# EAGLE board Temperature_sensor_cascade (EAGLE 7.7.0)
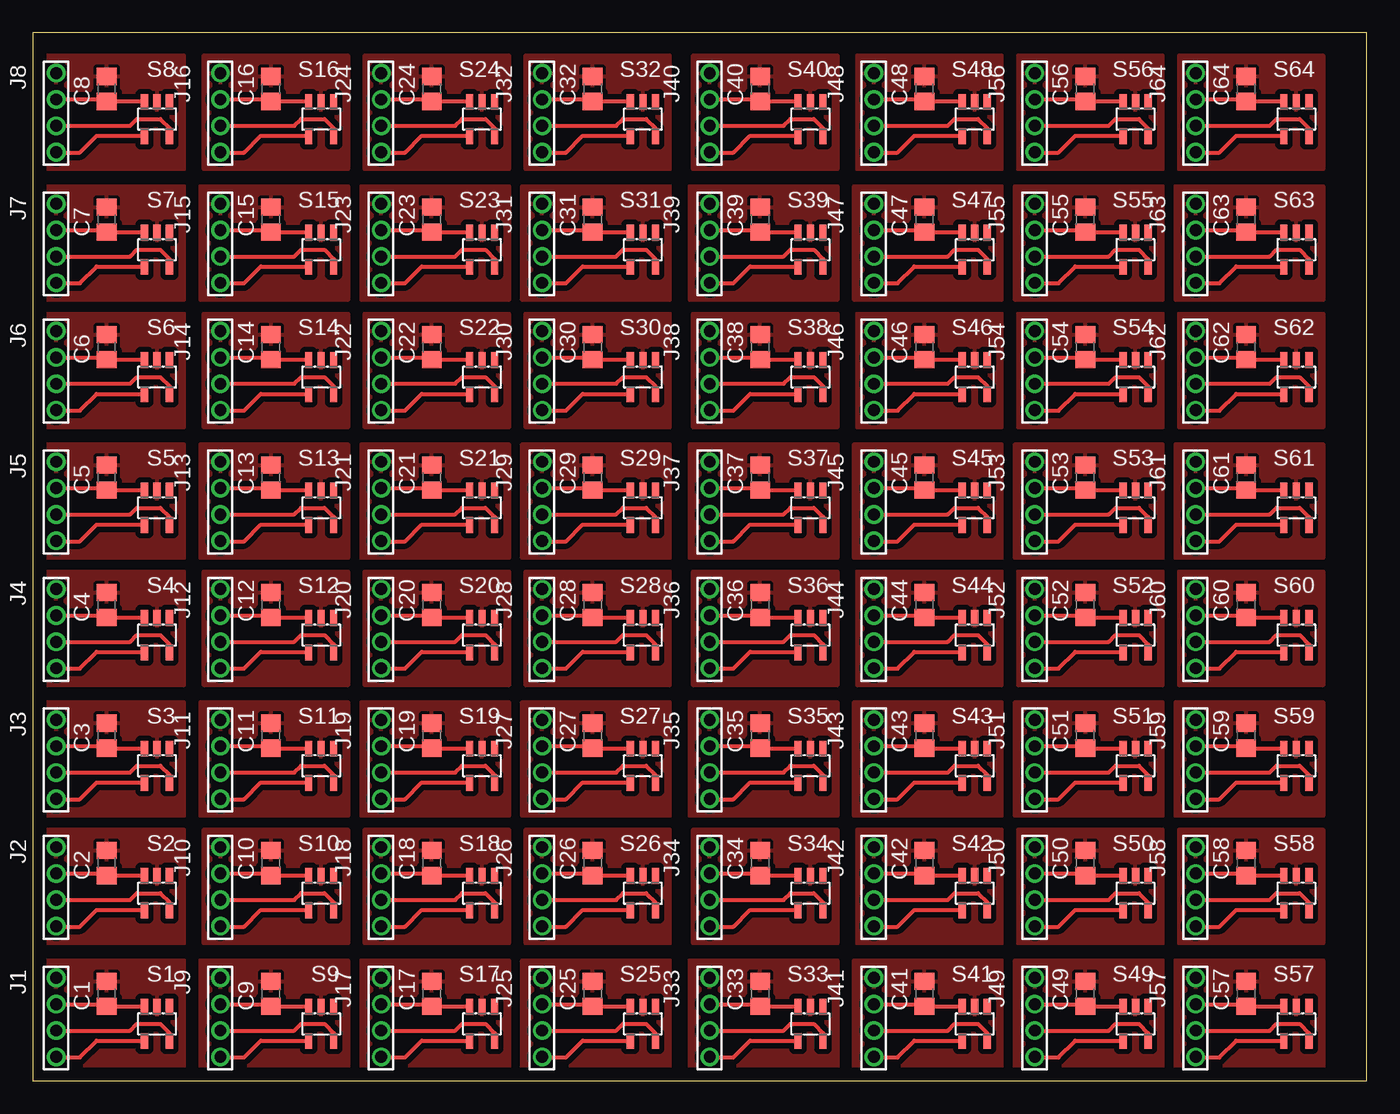
[diagram p0: board, top side]

Size 101.07 x 79.43 mm. Coordinates in mm from the lower left corner, seen from the top.
Outline: 0,0 101.07,0 101.07,79.43 0,79.43 0,0
Copper layers (1*16): Top 0.035mm / dielectric 1.5mm / Bottom 0.035mm
Design rules "default *": minimum track width 10mil, minimum drill 24mil, track to track 16mil, track to pad 14mil, pad to pad 14mil, via to via 14mil, smd to smd 14mil, copper to edge 40mil, drill to drill 8mil, minimum pad ring 10mil, minimum via ring 8mil, stop-mask expansion 4mil, vias tented up to drill 0mil, thermal gap 10mil

## Footprints (pad centres in the part's own frame; a part is rotated, then mirrored left to right if it is on the bottom)
C0805 = smd 1.3 x 1.5: 1 -0.95,0; 2 0.95,0
2MM_4PIN = drill 0.9 pad 1.27: 2 -2.73,-0.27; 4 -0.73,-0.27; 6 1.27,-0.27; 8 3.27,-0.27
SOT23-5L = smd 0.55 x 1.2: 1 -0.95,-1.3; 2 0,-1.3; 3 0.95,-1.3; 4 0.95,1.3; 5 -0.95,1.3

## Placement (x,y rotation side)
C1  0.01uF  [C0805]  5.59,6.6 90 top
C2  0.01uF  [C0805]  5.59,16.51 90 top
C3  0.01uF  [C0805]  5.59,26.16 90 top
C4  0.01uF  [C0805]  5.59,36.07 90 top
C5  0.01uF  [C0805]  5.59,45.72 90 top
C6  0.01uF  [C0805]  5.59,55.63 90 top
C7  0.01uF  [C0805]  5.59,65.28 90 top
C8  0.01uF  [C0805]  5.59,75.18 90 top
C9  0.01uF  [C0805]  18.03,6.6 90 top
C10  0.01uF  [C0805]  18.03,16.51 90 top
C11  0.01uF  [C0805]  18.03,26.16 90 top
C12  0.01uF  [C0805]  18.03,36.07 90 top
C13  0.01uF  [C0805]  18.03,45.72 90 top
C14  0.01uF  [C0805]  18.03,55.63 90 top
C15  0.01uF  [C0805]  18.03,65.28 90 top
C16  0.01uF  [C0805]  18.03,75.18 90 top
C17  0.01uF  [C0805]  30.23,6.6 90 top
C18  0.01uF  [C0805]  30.23,16.51 90 top
C19  0.01uF  [C0805]  30.23,26.16 90 top
C20  0.01uF  [C0805]  30.23,36.07 90 top
C21  0.01uF  [C0805]  30.23,45.72 90 top
C22  0.01uF  [C0805]  30.23,55.63 90 top
C23  0.01uF  [C0805]  30.23,65.28 90 top
C24  0.01uF  [C0805]  30.23,75.18 90 top
C25  0.01uF  [C0805]  42.42,6.6 90 top
C26  0.01uF  [C0805]  42.42,16.51 90 top
C27  0.01uF  [C0805]  42.42,26.16 90 top
C28  0.01uF  [C0805]  42.42,36.07 90 top
C29  0.01uF  [C0805]  42.42,45.72 90 top
C30  0.01uF  [C0805]  42.42,55.63 90 top
C31  0.01uF  [C0805]  42.42,65.28 90 top
C32  0.01uF  [C0805]  42.42,75.18 90 top
C33  0.01uF  [C0805]  55.12,6.6 90 top
C34  0.01uF  [C0805]  55.12,16.51 90 top
C35  0.01uF  [C0805]  55.12,26.16 90 top
C36  0.01uF  [C0805]  55.12,36.07 90 top
C37  0.01uF  [C0805]  55.12,45.72 90 top
C38  0.01uF  [C0805]  55.12,55.63 90 top
C39  0.01uF  [C0805]  55.12,65.28 90 top
C40  0.01uF  [C0805]  55.12,75.18 90 top
C41  0.01uF  [C0805]  67.56,6.6 90 top
C42  0.01uF  [C0805]  67.56,16.51 90 top
C43  0.01uF  [C0805]  67.56,26.16 90 top
C44  0.01uF  [C0805]  67.56,36.07 90 top
C45  0.01uF  [C0805]  67.56,45.72 90 top
C46  0.01uF  [C0805]  67.56,55.63 90 top
C47  0.01uF  [C0805]  67.56,65.28 90 top
C48  0.01uF  [C0805]  67.56,75.18 90 top
C49  0.01uF  [C0805]  79.76,6.6 90 top
C50  0.01uF  [C0805]  79.76,16.51 90 top
C51  0.01uF  [C0805]  79.76,26.16 90 top
C52  0.01uF  [C0805]  79.76,36.07 90 top
C53  0.01uF  [C0805]  79.76,45.72 90 top
C54  0.01uF  [C0805]  79.76,55.63 90 top
C55  0.01uF  [C0805]  79.76,65.28 90 top
C56  0.01uF  [C0805]  79.76,75.18 90 top
C57  0.01uF  [C0805]  91.95,6.6 90 top
C58  0.01uF  [C0805]  91.95,16.51 90 top
C59  0.01uF  [C0805]  91.95,26.16 90 top
C60  0.01uF  [C0805]  91.95,36.07 90 top
C61  0.01uF  [C0805]  91.95,45.72 90 top
C62  0.01uF  [C0805]  91.95,55.63 90 top
C63  0.01uF  [C0805]  91.95,65.28 90 top
C64  0.01uF  [C0805]  91.95,75.18 90 top
J1  4_PIN_2MM  [2MM_4PIN]  2.03,5.08 270 top
J2  4_PIN_2MM  [2MM_4PIN]  2.03,14.99 270 top
J3  4_PIN_2MM  [2MM_4PIN]  2.03,24.64 270 top
J4  4_PIN_2MM  [2MM_4PIN]  2.03,34.54 270 top
J5  4_PIN_2MM  [2MM_4PIN]  2.03,44.2 270 top
J6  4_PIN_2MM  [2MM_4PIN]  2.03,54.1 270 top
J7  4_PIN_2MM  [2MM_4PIN]  2.03,63.75 270 top
J8  4_PIN_2MM  [2MM_4PIN]  2.03,73.66 270 top
J9  4_PIN_2MM  [2MM_4PIN]  14.48,5.08 270 top
J10  4_PIN_2MM  [2MM_4PIN]  14.48,14.99 270 top
J11  4_PIN_2MM  [2MM_4PIN]  14.48,24.64 270 top
J12  4_PIN_2MM  [2MM_4PIN]  14.48,34.54 270 top
J13  4_PIN_2MM  [2MM_4PIN]  14.48,44.2 270 top
J14  4_PIN_2MM  [2MM_4PIN]  14.48,54.1 270 top
J15  4_PIN_2MM  [2MM_4PIN]  14.48,63.75 270 top
J16  4_PIN_2MM  [2MM_4PIN]  14.48,73.66 270 top
J17  4_PIN_2MM  [2MM_4PIN]  26.67,5.08 270 top
J18  4_PIN_2MM  [2MM_4PIN]  26.67,14.99 270 top
J19  4_PIN_2MM  [2MM_4PIN]  26.67,24.64 270 top
J20  4_PIN_2MM  [2MM_4PIN]  26.67,34.54 270 top
J21  4_PIN_2MM  [2MM_4PIN]  26.67,44.2 270 top
J22  4_PIN_2MM  [2MM_4PIN]  26.67,54.1 270 top
J23  4_PIN_2MM  [2MM_4PIN]  26.67,63.75 270 top
J24  4_PIN_2MM  [2MM_4PIN]  26.67,73.66 270 top
J25  4_PIN_2MM  [2MM_4PIN]  38.86,5.08 270 top
J26  4_PIN_2MM  [2MM_4PIN]  38.86,14.99 270 top
J27  4_PIN_2MM  [2MM_4PIN]  38.86,24.64 270 top
J28  4_PIN_2MM  [2MM_4PIN]  38.86,34.54 270 top
J29  4_PIN_2MM  [2MM_4PIN]  38.86,44.2 270 top
J30  4_PIN_2MM  [2MM_4PIN]  38.86,54.1 270 top
J31  4_PIN_2MM  [2MM_4PIN]  38.86,63.75 270 top
J32  4_PIN_2MM  [2MM_4PIN]  38.86,73.66 270 top
J33  4_PIN_2MM  [2MM_4PIN]  51.56,5.08 270 top
J34  4_PIN_2MM  [2MM_4PIN]  51.56,14.99 270 top
J35  4_PIN_2MM  [2MM_4PIN]  51.56,24.64 270 top
J36  4_PIN_2MM  [2MM_4PIN]  51.56,34.54 270 top
J37  4_PIN_2MM  [2MM_4PIN]  51.56,44.2 270 top
J38  4_PIN_2MM  [2MM_4PIN]  51.56,54.1 270 top
J39  4_PIN_2MM  [2MM_4PIN]  51.56,63.75 270 top
J40  4_PIN_2MM  [2MM_4PIN]  51.56,73.66 270 top
J41  4_PIN_2MM  [2MM_4PIN]  64.01,5.08 270 top
J42  4_PIN_2MM  [2MM_4PIN]  64.01,14.99 270 top
J43  4_PIN_2MM  [2MM_4PIN]  64.01,24.64 270 top
J44  4_PIN_2MM  [2MM_4PIN]  64.01,34.54 270 top
J45  4_PIN_2MM  [2MM_4PIN]  64.01,44.2 270 top
J46  4_PIN_2MM  [2MM_4PIN]  64.01,54.1 270 top
J47  4_PIN_2MM  [2MM_4PIN]  64.01,63.75 270 top
J48  4_PIN_2MM  [2MM_4PIN]  64.01,73.66 270 top
J49  4_PIN_2MM  [2MM_4PIN]  76.2,5.08 270 top
J50  4_PIN_2MM  [2MM_4PIN]  76.2,14.99 270 top
J51  4_PIN_2MM  [2MM_4PIN]  76.2,24.64 270 top
J52  4_PIN_2MM  [2MM_4PIN]  76.2,34.54 270 top
J53  4_PIN_2MM  [2MM_4PIN]  76.2,44.2 270 top
J54  4_PIN_2MM  [2MM_4PIN]  76.2,54.1 270 top
J55  4_PIN_2MM  [2MM_4PIN]  76.2,63.75 270 top
J56  4_PIN_2MM  [2MM_4PIN]  76.2,73.66 270 top
J57  4_PIN_2MM  [2MM_4PIN]  88.39,5.08 270 top
J58  4_PIN_2MM  [2MM_4PIN]  88.39,14.99 270 top
J59  4_PIN_2MM  [2MM_4PIN]  88.39,24.64 270 top
J60  4_PIN_2MM  [2MM_4PIN]  88.39,34.54 270 top
J61  4_PIN_2MM  [2MM_4PIN]  88.39,44.2 270 top
J62  4_PIN_2MM  [2MM_4PIN]  88.39,54.1 270 top
J63  4_PIN_2MM  [2MM_4PIN]  88.39,63.75 270 top
J64  4_PIN_2MM  [2MM_4PIN]  88.39,73.66 270 top
S1  TC74  [SOT23-5L]  9.4,4.32 180 top
S2  TC74  [SOT23-5L]  9.4,14.22 180 top
S3  TC74  [SOT23-5L]  9.4,23.88 180 top
S4  TC74  [SOT23-5L]  9.4,33.78 180 top
S5  TC74  [SOT23-5L]  9.4,43.43 180 top
S6  TC74  [SOT23-5L]  9.4,53.34 180 top
S7  TC74  [SOT23-5L]  9.4,62.99 180 top
S8  TC74  [SOT23-5L]  9.4,72.9 180 top
S9  TC74  [SOT23-5L]  21.84,4.32 180 top
S10  TC74  [SOT23-5L]  21.84,14.22 180 top
S11  TC74  [SOT23-5L]  21.84,23.88 180 top
S12  TC74  [SOT23-5L]  21.84,33.78 180 top
S13  TC74  [SOT23-5L]  21.84,43.43 180 top
S14  TC74  [SOT23-5L]  21.84,53.34 180 top
S15  TC74  [SOT23-5L]  21.84,62.99 180 top
S16  TC74  [SOT23-5L]  21.84,72.9 180 top
S17  TC74  [SOT23-5L]  34.04,4.32 180 top
S18  TC74  [SOT23-5L]  34.04,14.22 180 top
S19  TC74  [SOT23-5L]  34.04,23.88 180 top
S20  TC74  [SOT23-5L]  34.04,33.78 180 top
S21  TC74  [SOT23-5L]  34.04,43.43 180 top
S22  TC74  [SOT23-5L]  34.04,53.34 180 top
S23  TC74  [SOT23-5L]  34.04,62.99 180 top
S24  TC74  [SOT23-5L]  34.04,72.9 180 top
S25  TC74  [SOT23-5L]  46.23,4.32 180 top
S26  TC74  [SOT23-5L]  46.23,14.22 180 top
S27  TC74  [SOT23-5L]  46.23,23.88 180 top
S28  TC74  [SOT23-5L]  46.23,33.78 180 top
S29  TC74  [SOT23-5L]  46.23,43.43 180 top
S30  TC74  [SOT23-5L]  46.23,53.34 180 top
S31  TC74  [SOT23-5L]  46.23,62.99 180 top
S32  TC74  [SOT23-5L]  46.23,72.9 180 top
S33  TC74  [SOT23-5L]  58.93,4.32 180 top
S34  TC74  [SOT23-5L]  58.93,14.22 180 top
S35  TC74  [SOT23-5L]  58.93,23.88 180 top
S36  TC74  [SOT23-5L]  58.93,33.78 180 top
S37  TC74  [SOT23-5L]  58.93,43.43 180 top
S38  TC74  [SOT23-5L]  58.93,53.34 180 top
S39  TC74  [SOT23-5L]  58.93,62.99 180 top
S40  TC74  [SOT23-5L]  58.93,72.9 180 top
S41  TC74  [SOT23-5L]  71.37,4.32 180 top
S42  TC74  [SOT23-5L]  71.37,14.22 180 top
S43  TC74  [SOT23-5L]  71.37,23.88 180 top
S44  TC74  [SOT23-5L]  71.37,33.78 180 top
S45  TC74  [SOT23-5L]  71.37,43.43 180 top
S46  TC74  [SOT23-5L]  71.37,53.34 180 top
S47  TC74  [SOT23-5L]  71.37,62.99 180 top
S48  TC74  [SOT23-5L]  71.37,72.9 180 top
S49  TC74  [SOT23-5L]  83.57,4.32 180 top
S50  TC74  [SOT23-5L]  83.57,14.22 180 top
S51  TC74  [SOT23-5L]  83.57,23.88 180 top
S52  TC74  [SOT23-5L]  83.57,33.78 180 top
S53  TC74  [SOT23-5L]  83.57,43.43 180 top
S54  TC74  [SOT23-5L]  83.57,53.34 180 top
S55  TC74  [SOT23-5L]  83.57,62.99 180 top
S56  TC74  [SOT23-5L]  83.57,72.9 180 top
S57  TC74  [SOT23-5L]  95.76,4.32 180 top
S58  TC74  [SOT23-5L]  95.76,14.22 180 top
S59  TC74  [SOT23-5L]  95.76,23.88 180 top
S60  TC74  [SOT23-5L]  95.76,33.78 180 top
S61  TC74  [SOT23-5L]  95.76,43.43 180 top
S62  TC74  [SOT23-5L]  95.76,53.34 180 top
S63  TC74  [SOT23-5L]  95.76,62.99 180 top
S64  TC74  [SOT23-5L]  95.76,72.9 180 top

## Library data of the parts
C1-C64 = rcl
J1-J64 S1-S64 = Mine

## Nets
GND: C1.2 J1.2 S1.2
GND1: C2.2 J2.2 S2.2
GND2: C3.2 J3.2 S3.2
GND3: C4.2 J4.2 S4.2
GND4: C5.2 J5.2 S5.2
GND5: C6.2 J6.2 S6.2
GND6: C7.2 J7.2 S7.2
GND7: C8.2 J8.2 S8.2
GND8: C9.2 J9.2 S9.2
GND9: C10.2 J10.2 S10.2
GND10: C11.2 J11.2 S11.2
GND11: C12.2 J12.2 S12.2
GND12: C13.2 J13.2 S13.2
GND13: C14.2 J14.2 S14.2
GND14: C15.2 J15.2 S15.2
GND15: C16.2 J16.2 S16.2
GND16: C17.2 J17.2 S17.2
GND17: C18.2 J18.2 S18.2
GND18: C19.2 J19.2 S19.2
GND19: C20.2 J20.2 S20.2
GND20: C21.2 J21.2 S21.2
GND21: C22.2 J22.2 S22.2
GND22: C23.2 J23.2 S23.2
GND23: C24.2 J24.2 S24.2
GND24: C25.2 J25.2 S25.2
GND25: C26.2 J26.2 S26.2
GND26: C27.2 J27.2 S27.2
GND27: C28.2 J28.2 S28.2
GND28: C29.2 J29.2 S29.2
GND29: C30.2 J30.2 S30.2
GND30: C31.2 J31.2 S31.2
GND31: C32.2 J32.2 S32.2
GND32: C33.2 J33.2 S33.2
GND33: C34.2 J34.2 S34.2
GND34: C35.2 J35.2 S35.2
GND35: C36.2 J36.2 S36.2
GND36: C37.2 J37.2 S37.2
GND37: C38.2 J38.2 S38.2
GND38: C39.2 J39.2 S39.2
GND39: C40.2 J40.2 S40.2
GND40: C41.2 J41.2 S41.2
GND41: C42.2 J42.2 S42.2
GND42: C43.2 J43.2 S43.2
GND43: C44.2 J44.2 S44.2
GND44: C45.2 J45.2 S45.2
GND45: C46.2 J46.2 S46.2
GND46: C47.2 J47.2 S47.2
GND47: C48.2 J48.2 S48.2
GND48: C49.2 J49.2 S49.2
GND49: C50.2 J50.2 S50.2
GND50: C51.2 J51.2 S51.2
GND51: C52.2 J52.2 S52.2
GND52: C53.2 J53.2 S53.2
GND53: C54.2 J54.2 S54.2
GND54: C55.2 J55.2 S55.2
GND55: C56.2 J56.2 S56.2
GND56: C57.2 J57.2 S57.2
GND57: C58.2 J58.2 S58.2
GND58: C59.2 J59.2 S59.2
GND59: C60.2 J60.2 S60.2
GND60: C61.2 J61.2 S61.2
GND61: C62.2 J62.2 S62.2
GND62: C63.2 J63.2 S63.2
GND63: C64.2 J64.2 S64.2
N$1: J2.6 S2.5
N$2: C1.1 J1.4 S1.3
N$3: J1.6 S1.5
N$4: J1.8 S1.4
N$5: J2.8 S2.4
N$6: C2.1 J2.4 S2.3
N$7: J3.6 S3.5
N$8: J3.8 S3.4
N$9: C3.1 J3.4 S3.3
N$10: J4.6 S4.5
N$11: J4.8 S4.4
N$12: C4.1 J4.4 S4.3
N$13: J5.6 S5.5
N$14: J5.8 S5.4
N$15: C5.1 J5.4 S5.3
N$16: J6.6 S6.5
N$17: J6.8 S6.4
N$18: C6.1 J6.4 S6.3
N$19: J7.6 S7.5
N$20: J7.8 S7.4
N$21: C7.1 J7.4 S7.3
N$22: J8.6 S8.5
N$23: J8.8 S8.4
N$24: C8.1 J8.4 S8.3
N$25: J9.6 S9.5
N$26: J9.8 S9.4
N$27: C9.1 J9.4 S9.3
N$28: J10.6 S10.5
N$29: J10.8 S10.4
N$30: C10.1 J10.4 S10.3
N$31: J11.6 S11.5
N$32: J11.8 S11.4
N$33: C11.1 J11.4 S11.3
N$34: J12.6 S12.5
N$35: J12.8 S12.4
N$36: C12.1 J12.4 S12.3
N$37: J13.6 S13.5
N$38: J13.8 S13.4
N$39: C13.1 J13.4 S13.3
N$40: J14.6 S14.5
N$41: J14.8 S14.4
N$42: C14.1 J14.4 S14.3
N$43: J15.6 S15.5
N$44: J15.8 S15.4
N$45: C15.1 J15.4 S15.3
N$46: J16.6 S16.5
N$47: J16.8 S16.4
N$48: C16.1 J16.4 S16.3
N$49: J17.6 S17.5
N$50: J17.8 S17.4
N$51: C17.1 J17.4 S17.3
N$52: J18.6 S18.5
N$53: J18.8 S18.4
N$54: C18.1 J18.4 S18.3
N$55: J19.6 S19.5
N$56: J19.8 S19.4
N$57: C19.1 J19.4 S19.3
N$58: J20.6 S20.5
N$59: J20.8 S20.4
N$60: C20.1 J20.4 S20.3
N$61: J21.6 S21.5
N$62: J21.8 S21.4
N$63: C21.1 J21.4 S21.3
N$64: J22.6 S22.5
N$65: J22.8 S22.4
N$66: C22.1 J22.4 S22.3
N$67: J23.6 S23.5
N$68: J23.8 S23.4
N$69: C23.1 J23.4 S23.3
N$70: J24.6 S24.5
N$71: J24.8 S24.4
N$72: C24.1 J24.4 S24.3
N$73: J25.6 S25.5
N$74: J25.8 S25.4
N$75: C25.1 J25.4 S25.3
N$76: J26.6 S26.5
N$77: J26.8 S26.4
N$78: C26.1 J26.4 S26.3
N$79: J27.6 S27.5
N$80: J27.8 S27.4
N$81: C27.1 J27.4 S27.3
N$82: J28.6 S28.5
N$83: J28.8 S28.4
N$84: C28.1 J28.4 S28.3
N$85: J29.6 S29.5
N$86: J29.8 S29.4
N$87: C29.1 J29.4 S29.3
N$88: J30.6 S30.5
N$89: J30.8 S30.4
N$90: C30.1 J30.4 S30.3
N$91: J31.6 S31.5
N$92: J31.8 S31.4
N$93: C31.1 J31.4 S31.3
N$94: J32.6 S32.5
N$95: J32.8 S32.4
N$96: C32.1 J32.4 S32.3
N$97: J33.6 S33.5
N$98: J33.8 S33.4
N$99: C33.1 J33.4 S33.3
N$100: J34.6 S34.5
N$101: J34.8 S34.4
N$102: C34.1 J34.4 S34.3
N$103: J35.6 S35.5
N$104: J35.8 S35.4
N$105: C35.1 J35.4 S35.3
N$106: J36.6 S36.5
N$107: J36.8 S36.4
N$108: C36.1 J36.4 S36.3
N$109: J37.6 S37.5
N$110: J37.8 S37.4
N$111: C37.1 J37.4 S37.3
N$112: J38.6 S38.5
N$113: J38.8 S38.4
N$114: C38.1 J38.4 S38.3
N$115: J39.6 S39.5
N$116: J39.8 S39.4
N$117: C39.1 J39.4 S39.3
N$118: J40.6 S40.5
N$119: J40.8 S40.4
N$120: C40.1 J40.4 S40.3
N$121: J41.6 S41.5
N$122: J41.8 S41.4
N$123: C41.1 J41.4 S41.3
N$124: J42.6 S42.5
N$125: J42.8 S42.4
N$126: C42.1 J42.4 S42.3
N$127: J43.6 S43.5
N$128: J43.8 S43.4
N$129: C43.1 J43.4 S43.3
N$130: J44.6 S44.5
N$131: J44.8 S44.4
N$132: C44.1 J44.4 S44.3
N$133: J45.6 S45.5
N$134: J45.8 S45.4
N$135: C45.1 J45.4 S45.3
N$136: J46.6 S46.5
N$137: J46.8 S46.4
N$138: C46.1 J46.4 S46.3
N$139: J47.6 S47.5
N$140: J47.8 S47.4
N$141: C47.1 J47.4 S47.3
N$142: J48.6 S48.5
N$143: J48.8 S48.4
N$144: C48.1 J48.4 S48.3
N$145: J49.6 S49.5
N$146: J49.8 S49.4
N$147: C49.1 J49.4 S49.3
N$148: J50.6 S50.5
N$149: J50.8 S50.4
N$150: C50.1 J50.4 S50.3
N$151: J51.6 S51.5
N$152: J51.8 S51.4
N$153: C51.1 J51.4 S51.3
N$154: J52.6 S52.5
N$155: J52.8 S52.4
N$156: C52.1 J52.4 S52.3
N$157: J53.6 S53.5
N$158: J53.8 S53.4
N$159: C53.1 J53.4 S53.3
N$160: J54.6 S54.5
N$161: J54.8 S54.4
N$162: C54.1 J54.4 S54.3
N$163: J55.6 S55.5
N$164: J55.8 S55.4
N$165: C55.1 J55.4 S55.3
N$166: J56.6 S56.5
N$167: J56.8 S56.4
N$168: C56.1 J56.4 S56.3
N$169: J57.6 S57.5
N$170: J57.8 S57.4
N$171: C57.1 J57.4 S57.3
N$172: J58.6 S58.5
N$173: J58.8 S58.4
N$174: C58.1 J58.4 S58.3
N$175: J59.6 S59.5
N$176: J59.8 S59.4
N$177: C59.1 J59.4 S59.3
N$178: J60.6 S60.5
N$179: J60.8 S60.4
N$180: C60.1 J60.4 S60.3
N$181: J61.6 S61.5
N$182: J61.8 S61.4
N$183: C61.1 J61.4 S61.3
N$184: J62.6 S62.5
N$185: J62.8 S62.4
N$186: C62.1 J62.4 S62.3
N$187: J63.6 S63.5
N$188: J63.8 S63.4
N$189: C63.1 J63.4 S63.3
N$190: J64.6 S64.5
N$191: J64.8 S64.4
N$192: C64.1 J64.4 S64.3

## Tracks (layer width: path | path; a pad name or v marks a point on that pad's centre or on a via)
GND
  pour Top: 0.25,9.14 11.43,9.14 11.43,0.51 0.25,0.51
GND1
  pour Top: 0.51,19.05 11.43,19.05 11.43,10.41 0.51,10.41
GND2
  pour Top: 0.25,28.7 11.43,28.7 11.43,20.07 0.25,20.07
GND3
  pour Top: 0.51,38.61 11.43,38.61 11.43,29.97 0.51,29.97
GND4
  pour Top: 0.25,48.26 11.43,48.26 11.43,39.62 0.25,39.62
GND5
  pour Top: 0.51,58.17 11.43,58.17 11.43,49.53 0.51,49.53
GND6
  pour Top: 0.25,67.82 11.43,67.82 11.43,59.18 0.25,59.18
GND7
  pour Top: 0.51,77.72 11.43,77.72 11.43,69.09 0.51,69.09
GND8
  pour Top: 12.7,9.14 23.88,9.14 23.88,0.51 12.7,0.51
GND9
  pour Top: 12.95,19.05 23.88,19.05 23.88,10.41 12.95,10.41
GND10
  pour Top: 12.7,28.7 23.88,28.7 23.88,20.07 12.7,20.07
GND11
  pour Top: 12.95,38.61 23.88,38.61 23.88,29.97 12.95,29.97
GND12
  pour Top: 12.7,48.26 23.88,48.26 23.88,39.62 12.7,39.62
GND13
  pour Top: 12.95,58.17 23.88,58.17 23.88,49.53 12.95,49.53
GND14
  pour Top: 12.7,67.82 23.88,67.82 23.88,59.18 12.7,59.18
GND15
  pour Top: 12.95,77.72 23.88,77.72 23.88,69.09 12.95,69.09
GND16
  pour Top: 24.89,9.14 36.07,9.14 36.07,0.51 24.89,0.51
GND17
  pour Top: 25.15,19.05 36.07,19.05 36.07,10.41 25.15,10.41
GND18
  pour Top: 24.89,28.7 36.07,28.7 36.07,20.07 24.89,20.07
GND19
  pour Top: 25.15,38.61 36.07,38.61 36.07,29.97 25.15,29.97
GND20
  pour Top: 24.89,48.26 36.07,48.26 36.07,39.62 24.89,39.62
GND21
  pour Top: 25.15,58.17 36.07,58.17 36.07,49.53 25.15,49.53
GND22
  pour Top: 24.89,67.82 36.07,67.82 36.07,59.18 24.89,59.18
GND23
  pour Top: 25.15,77.72 36.07,77.72 36.07,69.09 25.15,69.09
GND24
  pour Top: 37.08,9.14 48.26,9.14 48.26,0.51 37.08,0.51
GND25
  pour Top: 37.34,19.05 48.26,19.05 48.26,10.41 37.34,10.41
GND26
  pour Top: 37.08,28.7 48.26,28.7 48.26,20.07 37.08,20.07
GND27
  pour Top: 37.34,38.61 48.26,38.61 48.26,29.97 37.34,29.97
GND28
  pour Top: 37.08,48.26 48.26,48.26 48.26,39.62 37.08,39.62
GND29
  pour Top: 37.34,58.17 48.26,58.17 48.26,49.53 37.34,49.53
GND30
  pour Top: 37.08,67.82 48.26,67.82 48.26,59.18 37.08,59.18
GND31
  pour Top: 37.34,77.72 48.26,77.72 48.26,69.09 37.34,69.09
GND32
  pour Top: 49.78,9.14 60.96,9.14 60.96,0.51 49.78,0.51
GND33
  pour Top: 50.04,19.05 60.96,19.05 60.96,10.41 50.04,10.41
GND34
  pour Top: 49.78,28.7 60.96,28.7 60.96,20.07 49.78,20.07
GND35
  pour Top: 50.04,38.61 60.96,38.61 60.96,29.97 50.04,29.97
GND36
  pour Top: 49.78,48.26 60.96,48.26 60.96,39.62 49.78,39.62
GND37
  pour Top: 50.04,58.17 60.96,58.17 60.96,49.53 50.04,49.53
GND38
  pour Top: 49.78,67.82 60.96,67.82 60.96,59.18 49.78,59.18
GND39
  pour Top: 50.04,77.72 60.96,77.72 60.96,69.09 50.04,69.09
GND40
  pour Top: 62.23,9.14 73.41,9.14 73.41,0.51 62.23,0.51
GND41
  pour Top: 62.48,19.05 73.41,19.05 73.41,10.41 62.48,10.41
GND42
  pour Top: 62.23,28.7 73.41,28.7 73.41,20.07 62.23,20.07
GND43
  pour Top: 62.48,38.61 73.41,38.61 73.41,29.97 62.48,29.97
GND44
  pour Top: 62.23,48.26 73.41,48.26 73.41,39.62 62.23,39.62
GND45
  pour Top: 62.48,58.17 73.41,58.17 73.41,49.53 62.48,49.53
GND46
  pour Top: 62.23,67.82 73.41,67.82 73.41,59.18 62.23,59.18
GND47
  pour Top: 62.48,77.72 73.41,77.72 73.41,69.09 62.48,69.09
GND48
  pour Top: 74.42,9.14 85.6,9.14 85.6,0.51 74.42,0.51
GND49
  pour Top: 74.68,19.05 85.6,19.05 85.6,10.41 74.68,10.41
GND50
  pour Top: 74.42,28.7 85.6,28.7 85.6,20.07 74.42,20.07
GND51
  pour Top: 74.68,38.61 85.6,38.61 85.6,29.97 74.68,29.97
GND52
  pour Top: 74.42,48.26 85.6,48.26 85.6,39.62 74.42,39.62
GND53
  pour Top: 74.68,58.17 85.6,58.17 85.6,49.53 74.68,49.53
GND54
  pour Top: 74.42,67.82 85.6,67.82 85.6,59.18 74.42,59.18
GND55
  pour Top: 74.68,77.72 85.6,77.72 85.6,69.09 74.68,69.09
GND56
  pour Top: 86.61,9.14 97.79,9.14 97.79,0.51 86.61,0.51
GND57
  pour Top: 86.87,19.05 97.79,19.05 97.79,10.41 86.87,10.41
GND58
  pour Top: 86.61,28.7 97.79,28.7 97.79,20.07 86.61,20.07
GND59
  pour Top: 86.87,38.61 97.79,38.61 97.79,29.97 86.87,29.97
GND60
  pour Top: 86.61,48.26 97.79,48.26 97.79,39.62 86.61,39.62
GND61
  pour Top: 86.87,58.17 97.79,58.17 97.79,49.53 86.87,49.53
GND62
  pour Top: 86.61,67.82 97.79,67.82 97.79,59.18 86.61,59.18
GND63
  pour Top: 86.87,77.72 97.79,77.72 97.79,69.09 86.87,69.09
N$1
  Top 0.305: J2.6 7.37,13.72 7.87,14.22 9.65,14.22 10.35,13.53 S2.5
N$2
  Top 0.305: J1.4 5.43,5.81 C1.1 5.62,5.62 S1.3
N$3
  Top 0.305: J1.6 7.37,3.81 7.87,4.32 9.65,4.32 10.35,3.62 S1.5
N$4
  Top 0.305: J1.8 1.79,1.78 3.56,1.78 4.83,3.05 8.42,3.05 S1.4 8.35,3.02
N$5
  Top 0.305: J2.8 1.79,11.68 3.56,11.68 4.83,12.95 8.42,12.95 S2.4 8.35,12.92
N$6
  Top 0.305: J2.4 5.43,15.72 C2.1 5.62,15.52 S2.3
N$7
  Top 0.305: J3.6 7.37,23.37 7.87,23.88 9.65,23.88 10.35,23.18 S3.5
N$8
  Top 0.305: J3.8 1.79,21.34 3.56,21.34 4.83,22.61 8.42,22.61 S3.4 8.35,22.58
N$9
  Top 0.305: J3.4 5.43,25.37 C3.1 5.62,25.18 S3.3
N$10
  Top 0.305: J4.6 7.37,33.27 7.87,33.78 9.65,33.78 10.35,33.09 S4.5
N$11
  Top 0.305: J4.8 1.79,31.24 3.56,31.24 4.83,32.51 8.42,32.51 S4.4 8.35,32.48
N$12
  Top 0.305: J4.4 5.43,35.27 C4.1 5.62,35.08 S4.3
N$13
  Top 0.305: J5.6 7.37,42.93 7.87,43.43 9.65,43.43 10.35,42.74 S5.5
N$14
  Top 0.305: J5.8 1.79,40.89 3.56,40.89 4.83,42.16 8.42,42.16 S5.4 8.35,42.13
N$15
  Top 0.305: J5.4 5.43,44.93 C5.1 5.62,44.73 S5.3
N$16
  Top 0.305: J6.6 7.37,52.83 7.87,53.34 9.65,53.34 10.35,52.64 S6.5
N$17
  Top 0.305: J6.8 1.79,50.8 3.56,50.8 4.83,52.07 8.42,52.07 S6.4 8.35,52.04
N$18
  Top 0.305: J6.4 5.43,54.83 C6.1 5.62,54.64 S6.3
N$19
  Top 0.305: J7.6 7.37,62.48 7.87,62.99 9.65,62.99 10.35,62.3 S7.5
N$20
  Top 0.305: J7.8 1.79,60.45 3.56,60.45 4.83,61.72 8.42,61.72 S7.4 8.35,61.69
N$21
  Top 0.305: J7.4 5.43,64.48 C7.1 5.62,64.29 S7.3
N$22
  Top 0.305: J8.6 7.37,72.39 7.87,72.9 9.65,72.9 10.35,72.2 S8.5
N$23
  Top 0.305: J8.8 1.79,70.36 3.56,70.36 4.83,71.63 8.42,71.63 S8.4 8.35,71.6
N$24
  Top 0.305: J8.4 5.43,74.39 C8.1 5.62,74.2 S8.3
N$25
  Top 0.305: J9.6 19.81,3.81 20.32,4.32 22.1,4.32 22.79,3.62 S9.5
N$26
  Top 0.305: J9.8 14.24,1.78 16,1.78 17.27,3.05 20.86,3.05 S9.4 20.8,3.02
N$27
  Top 0.305: J9.4 17.88,5.81 C9.1 18.07,5.62 S9.3
N$28
  Top 0.305: J10.6 19.81,13.72 20.32,14.22 22.1,14.22 22.79,13.53 S10.5
N$29
  Top 0.305: J10.8 14.24,11.68 16,11.68 17.27,12.95 20.86,12.95 S10.4 20.8,12.92
N$30
  Top 0.305: J10.4 17.88,15.72 C10.1 18.07,15.52 S10.3
N$31
  Top 0.305: J11.6 19.81,23.37 20.32,23.88 22.1,23.88 22.79,23.18 S11.5
N$32
  Top 0.305: J11.8 14.24,21.34 16,21.34 17.27,22.61 20.86,22.61 S11.4 20.8,22.58
N$33
  Top 0.305: J11.4 17.88,25.37 C11.1 18.07,25.18 S11.3
N$34
  Top 0.305: J12.6 19.81,33.27 20.32,33.78 22.1,33.78 22.79,33.09 S12.5
N$35
  Top 0.305: J12.8 14.24,31.24 16,31.24 17.27,32.51 20.86,32.51 S12.4 20.8,32.48
N$36
  Top 0.305: J12.4 17.88,35.27 C12.1 18.07,35.08 S12.3
N$37
  Top 0.305: J13.6 19.81,42.93 20.32,43.43 22.1,43.43 22.79,42.74 S13.5
N$38
  Top 0.305: J13.8 14.24,40.89 16,40.89 17.27,42.16 20.86,42.16 S13.4 20.8,42.13
N$39
  Top 0.305: J13.4 17.88,44.93 C13.1 18.07,44.73 S13.3
N$40
  Top 0.305: J14.6 19.81,52.83 20.32,53.34 22.1,53.34 22.79,52.64 S14.5
N$41
  Top 0.305: J14.8 14.24,50.8 16,50.8 17.27,52.07 20.86,52.07 S14.4 20.8,52.04
N$42
  Top 0.305: J14.4 17.88,54.83 C14.1 18.07,54.64 S14.3
N$43
  Top 0.305: J15.6 19.81,62.48 20.32,62.99 22.1,62.99 22.79,62.3 S15.5
N$44
  Top 0.305: J15.8 14.24,60.45 16,60.45 17.27,61.72 20.86,61.72 S15.4 20.8,61.69
N$45
  Top 0.305: J15.4 17.88,64.48 C15.1 18.07,64.29 S15.3
N$46
  Top 0.305: J16.6 19.81,72.39 20.32,72.9 22.1,72.9 22.79,72.2 S16.5
N$47
  Top 0.305: J16.8 14.24,70.36 16,70.36 17.27,71.63 20.86,71.63 S16.4 20.8,71.6
N$48
  Top 0.305: J16.4 17.88,74.39 C16.1 18.07,74.2 S16.3
N$49
  Top 0.305: J17.6 32,3.81 32.51,4.32 34.29,4.32 34.99,3.62 S17.5
N$50
  Top 0.305: J17.8 26.43,1.78 28.19,1.78 29.46,3.05 33.06,3.05 S17.4 32.99,3.02
N$51
  Top 0.305: J17.4 30.07,5.81 C17.1 30.26,5.62 S17.3
N$52
  Top 0.305: J18.6 32,13.72 32.51,14.22 34.29,14.22 34.99,13.53 S18.5
N$53
  Top 0.305: J18.8 26.43,11.68 28.19,11.68 29.46,12.95 33.06,12.95 S18.4 32.99,12.92
N$54
  Top 0.305: J18.4 30.07,15.72 C18.1 30.26,15.52 S18.3
N$55
  Top 0.305: J19.6 32,23.37 32.51,23.88 34.29,23.88 34.99,23.18 S19.5
N$56
  Top 0.305: J19.8 26.43,21.34 28.19,21.34 29.46,22.61 33.06,22.61 S19.4 32.99,22.58
N$57
  Top 0.305: J19.4 30.07,25.37 C19.1 30.26,25.18 S19.3
N$58
  Top 0.305: J20.6 32,33.27 32.51,33.78 34.29,33.78 34.99,33.09 S20.5
N$59
  Top 0.305: J20.8 26.43,31.24 28.19,31.24 29.46,32.51 33.06,32.51 S20.4 32.99,32.48
N$60
  Top 0.305: J20.4 30.07,35.27 C20.1 30.26,35.08 S20.3
N$61
  Top 0.305: J21.6 32,42.93 32.51,43.43 34.29,43.43 34.99,42.74 S21.5
N$62
  Top 0.305: J21.8 26.43,40.89 28.19,40.89 29.46,42.16 33.06,42.16 S21.4 32.99,42.13
N$63
  Top 0.305: J21.4 30.07,44.93 C21.1 30.26,44.73 S21.3
N$64
  Top 0.305: J22.6 32,52.83 32.51,53.34 34.29,53.34 34.99,52.64 S22.5
N$65
  Top 0.305: J22.8 26.43,50.8 28.19,50.8 29.46,52.07 33.06,52.07 S22.4 32.99,52.04
N$66
  Top 0.305: J22.4 30.07,54.83 C22.1 30.26,54.64 S22.3
N$67
  Top 0.305: J23.6 32,62.48 32.51,62.99 34.29,62.99 34.99,62.3 S23.5
N$68
  Top 0.305: J23.8 26.43,60.45 28.19,60.45 29.46,61.72 33.06,61.72 S23.4 32.99,61.69
N$69
  Top 0.305: J23.4 30.07,64.48 C23.1 30.26,64.29 S23.3
N$70
  Top 0.305: J24.6 32,72.39 32.51,72.9 34.29,72.9 34.99,72.2 S24.5
N$71
  Top 0.305: J24.8 26.43,70.36 28.19,70.36 29.46,71.63 33.06,71.63 S24.4 32.99,71.6
N$72
  Top 0.305: J24.4 30.07,74.39 C24.1 30.26,74.2 S24.3
N$73
  Top 0.305: J25.6 44.2,3.81 44.7,4.32 46.48,4.32 47.18,3.62 S25.5
N$74
  Top 0.305: J25.8 38.62,1.78 40.39,1.78 41.66,3.05 45.25,3.05 S25.4 45.18,3.02
N$75
  Top 0.305: J25.4 42.26,5.81 C25.1 42.45,5.62 S25.3
N$76
  Top 0.305: J26.6 44.2,13.72 44.7,14.22 46.48,14.22 47.18,13.53 S26.5
N$77
  Top 0.305: J26.8 38.62,11.68 40.39,11.68 41.66,12.95 45.25,12.95 S26.4 45.18,12.92
N$78
  Top 0.305: J26.4 42.26,15.72 C26.1 42.45,15.52 S26.3
N$79
  Top 0.305: J27.6 44.2,23.37 44.7,23.88 46.48,23.88 47.18,23.18 S27.5
N$80
  Top 0.305: J27.8 38.62,21.34 40.39,21.34 41.66,22.61 45.25,22.61 S27.4 45.18,22.58
N$81
  Top 0.305: J27.4 42.26,25.37 C27.1 42.45,25.18 S27.3
N$82
  Top 0.305: J28.6 44.2,33.27 44.7,33.78 46.48,33.78 47.18,33.09 S28.5
N$83
  Top 0.305: J28.8 38.62,31.24 40.39,31.24 41.66,32.51 45.25,32.51 S28.4 45.18,32.48
N$84
  Top 0.305: J28.4 42.26,35.27 C28.1 42.45,35.08 S28.3
N$85
  Top 0.305: J29.6 44.2,42.93 44.7,43.43 46.48,43.43 47.18,42.74 S29.5
N$86
  Top 0.305: J29.8 38.62,40.89 40.39,40.89 41.66,42.16 45.25,42.16 S29.4 45.18,42.13
N$87
  Top 0.305: J29.4 42.26,44.93 C29.1 42.45,44.73 S29.3
N$88
  Top 0.305: J30.6 44.2,52.83 44.7,53.34 46.48,53.34 47.18,52.64 S30.5
N$89
  Top 0.305: J30.8 38.62,50.8 40.39,50.8 41.66,52.07 45.25,52.07 S30.4 45.18,52.04
N$90
  Top 0.305: J30.4 42.26,54.83 C30.1 42.45,54.64 S30.3
N$91
  Top 0.305: J31.6 44.2,62.48 44.7,62.99 46.48,62.99 47.18,62.3 S31.5
N$92
  Top 0.305: J31.8 38.62,60.45 40.39,60.45 41.66,61.72 45.25,61.72 S31.4 45.18,61.69
N$93
  Top 0.305: J31.4 42.26,64.48 C31.1 42.45,64.29 S31.3
N$94
  Top 0.305: J32.6 44.2,72.39 44.7,72.9 46.48,72.9 47.18,72.2 S32.5
N$95
  Top 0.305: J32.8 38.62,70.36 40.39,70.36 41.66,71.63 45.25,71.63 S32.4 45.18,71.6
N$96
  Top 0.305: J32.4 42.26,74.39 C32.1 42.45,74.2 S32.3
N$97
  Top 0.305: J33.6 56.9,3.81 57.4,4.32 59.18,4.32 59.88,3.62 S33.5
N$98
  Top 0.305: J33.8 51.32,1.78 53.09,1.78 54.36,3.05 57.95,3.05 S33.4 57.88,3.02
N$99
  Top 0.305: J33.4 54.96,5.81 C33.1 55.15,5.62 S33.3
N$100
  Top 0.305: J34.6 56.9,13.72 57.4,14.22 59.18,14.22 59.88,13.53 S34.5
N$101
  Top 0.305: J34.8 51.32,11.68 53.09,11.68 54.36,12.95 57.95,12.95 S34.4 57.88,12.92
N$102
  Top 0.305: J34.4 54.96,15.72 C34.1 55.15,15.52 S34.3
N$103
  Top 0.305: J35.6 56.9,23.37 57.4,23.88 59.18,23.88 59.88,23.18 S35.5
N$104
  Top 0.305: J35.8 51.32,21.34 53.09,21.34 54.36,22.61 57.95,22.61 S35.4 57.88,22.58
N$105
  Top 0.305: J35.4 54.96,25.37 C35.1 55.15,25.18 S35.3
N$106
  Top 0.305: J36.6 56.9,33.27 57.4,33.78 59.18,33.78 59.88,33.09 S36.5
N$107
  Top 0.305: J36.8 51.32,31.24 53.09,31.24 54.36,32.51 57.95,32.51 S36.4 57.88,32.48
N$108
  Top 0.305: J36.4 54.96,35.27 C36.1 55.15,35.08 S36.3
N$109
  Top 0.305: J37.6 56.9,42.93 57.4,43.43 59.18,43.43 59.88,42.74 S37.5
N$110
  Top 0.305: J37.8 51.32,40.89 53.09,40.89 54.36,42.16 57.95,42.16 S37.4 57.88,42.13
N$111
  Top 0.305: J37.4 54.96,44.93 C37.1 55.15,44.73 S37.3
N$112
  Top 0.305: J38.6 56.9,52.83 57.4,53.34 59.18,53.34 59.88,52.64 S38.5
N$113
  Top 0.305: J38.8 51.32,50.8 53.09,50.8 54.36,52.07 57.95,52.07 S38.4 57.88,52.04
N$114
  Top 0.305: J38.4 54.96,54.83 C38.1 55.15,54.64 S38.3
N$115
  Top 0.305: J39.6 56.9,62.48 57.4,62.99 59.18,62.99 59.88,62.3 S39.5
N$116
  Top 0.305: J39.8 51.32,60.45 53.09,60.45 54.36,61.72 57.95,61.72 S39.4 57.88,61.69
N$117
  Top 0.305: J39.4 54.96,64.48 C39.1 55.15,64.29 S39.3
N$118
  Top 0.305: J40.6 56.9,72.39 57.4,72.9 59.18,72.9 59.88,72.2 S40.5
N$119
  Top 0.305: J40.8 51.32,70.36 53.09,70.36 54.36,71.63 57.95,71.63 S40.4 57.88,71.6
N$120
  Top 0.305: J40.4 54.96,74.39 C40.1 55.15,74.2 S40.3
N$121
  Top 0.305: J41.6 69.34,3.81 69.85,4.32 71.63,4.32 72.32,3.62 S41.5
N$122
  Top 0.305: J41.8 63.77,1.78 65.53,1.78 66.8,3.05 70.39,3.05 S41.4 70.33,3.02
N$123
  Top 0.305: J41.4 67.41,5.81 C41.1 67.6,5.62 S41.3
N$124
  Top 0.305: J42.6 69.34,13.72 69.85,14.22 71.63,14.22 72.32,13.53 S42.5
N$125
  Top 0.305: J42.8 63.77,11.68 65.53,11.68 66.8,12.95 70.39,12.95 S42.4 70.33,12.92
N$126
  Top 0.305: J42.4 67.41,15.72 C42.1 67.6,15.52 S42.3
N$127
  Top 0.305: J43.6 69.34,23.37 69.85,23.88 71.63,23.88 72.32,23.18 S43.5
N$128
  Top 0.305: J43.8 63.77,21.34 65.53,21.34 66.8,22.61 70.39,22.61 S43.4 70.33,22.58
N$129
  Top 0.305: J43.4 67.41,25.37 C43.1 67.6,25.18 S43.3
N$130
  Top 0.305: J44.6 69.34,33.27 69.85,33.78 71.63,33.78 72.32,33.09 S44.5
N$131
  Top 0.305: J44.8 63.77,31.24 65.53,31.24 66.8,32.51 70.39,32.51 S44.4 70.33,32.48
N$132
  Top 0.305: J44.4 67.41,35.27 C44.1 67.6,35.08 S44.3
N$133
  Top 0.305: J45.6 69.34,42.93 69.85,43.43 71.63,43.43 72.32,42.74 S45.5
N$134
  Top 0.305: J45.8 63.77,40.89 65.53,40.89 66.8,42.16 70.39,42.16 S45.4 70.33,42.13
N$135
  Top 0.305: J45.4 67.41,44.93 C45.1 67.6,44.73 S45.3
N$136
  Top 0.305: J46.6 69.34,52.83 69.85,53.34 71.63,53.34 72.32,52.64 S46.5
N$137
  Top 0.305: J46.8 63.77,50.8 65.53,50.8 66.8,52.07 70.39,52.07 S46.4 70.33,52.04
N$138
  Top 0.305: J46.4 67.41,54.83 C46.1 67.6,54.64 S46.3
N$139
  Top 0.305: J47.6 69.34,62.48 69.85,62.99 71.63,62.99 72.32,62.3 S47.5
N$140
  Top 0.305: J47.8 63.77,60.45 65.53,60.45 66.8,61.72 70.39,61.72 S47.4 70.33,61.69
N$141
  Top 0.305: J47.4 67.41,64.48 C47.1 67.6,64.29 S47.3
N$142
  Top 0.305: J48.6 69.34,72.39 69.85,72.9 71.63,72.9 72.32,72.2 S48.5
N$143
  Top 0.305: J48.8 63.77,70.36 65.53,70.36 66.8,71.63 70.39,71.63 S48.4 70.33,71.6
N$144
  Top 0.305: J48.4 67.41,74.39 C48.1 67.6,74.2 S48.3
N$145
  Top 0.305: J49.6 81.53,3.81 82.04,4.32 83.82,4.32 84.52,3.62 S49.5
N$146
  Top 0.305: J49.8 75.96,1.78 77.72,1.78 78.99,3.05 82.59,3.05 S49.4 82.52,3.02
N$147
  Top 0.305: J49.4 79.6,5.81 C49.1 79.79,5.62 S49.3
N$148
  Top 0.305: J50.6 81.53,13.72 82.04,14.22 83.82,14.22 84.52,13.53 S50.5
N$149
  Top 0.305: J50.8 75.96,11.68 77.72,11.68 78.99,12.95 82.59,12.95 S50.4 82.52,12.92
N$150
  Top 0.305: J50.4 79.6,15.72 C50.1 79.79,15.52 S50.3
N$151
  Top 0.305: J51.6 81.53,23.37 82.04,23.88 83.82,23.88 84.52,23.18 S51.5
N$152
  Top 0.305: J51.8 75.96,21.34 77.72,21.34 78.99,22.61 82.59,22.61 S51.4 82.52,22.58
N$153
  Top 0.305: J51.4 79.6,25.37 C51.1 79.79,25.18 S51.3
N$154
  Top 0.305: J52.6 81.53,33.27 82.04,33.78 83.82,33.78 84.52,33.09 S52.5
N$155
  Top 0.305: J52.8 75.96,31.24 77.72,31.24 78.99,32.51 82.59,32.51 S52.4 82.52,32.48
N$156
  Top 0.305: J52.4 79.6,35.27 C52.1 79.79,35.08 S52.3
N$157
  Top 0.305: J53.6 81.53,42.93 82.04,43.43 83.82,43.43 84.52,42.74 S53.5
N$158
  Top 0.305: J53.8 75.96,40.89 77.72,40.89 78.99,42.16 82.59,42.16 S53.4 82.52,42.13
N$159
  Top 0.305: J53.4 79.6,44.93 C53.1 79.79,44.73 S53.3
N$160
  Top 0.305: J54.6 81.53,52.83 82.04,53.34 83.82,53.34 84.52,52.64 S54.5
N$161
  Top 0.305: J54.8 75.96,50.8 77.72,50.8 78.99,52.07 82.59,52.07 S54.4 82.52,52.04
N$162
  Top 0.305: J54.4 79.6,54.83 C54.1 79.79,54.64 S54.3
N$163
  Top 0.305: J55.6 81.53,62.48 82.04,62.99 83.82,62.99 84.52,62.3 S55.5
N$164
  Top 0.305: J55.8 75.96,60.45 77.72,60.45 78.99,61.72 82.59,61.72 S55.4 82.52,61.69
N$165
  Top 0.305: J55.4 79.6,64.48 C55.1 79.79,64.29 S55.3
N$166
  Top 0.305: J56.6 81.53,72.39 82.04,72.9 83.82,72.9 84.52,72.2 S56.5
N$167
  Top 0.305: J56.8 75.96,70.36 77.72,70.36 78.99,71.63 82.59,71.63 S56.4 82.52,71.6
N$168
  Top 0.305: J56.4 79.6,74.39 C56.1 79.79,74.2 S56.3
N$169
  Top 0.305: J57.6 93.73,3.81 94.23,4.32 96.01,4.32 96.71,3.62 S57.5
N$170
  Top 0.305: J57.8 88.15,1.78 89.92,1.78 91.19,3.05 94.78,3.05 S57.4 94.71,3.02
N$171
  Top 0.305: J57.4 91.79,5.81 C57.1 91.98,5.62 S57.3
N$172
  Top 0.305: J58.6 93.73,13.72 94.23,14.22 96.01,14.22 96.71,13.53 S58.5
N$173
  Top 0.305: J58.8 88.15,11.68 89.92,11.68 91.19,12.95 94.78,12.95 S58.4 94.71,12.92
N$174
  Top 0.305: J58.4 91.79,15.72 C58.1 91.98,15.52 S58.3
N$175
  Top 0.305: J59.6 93.73,23.37 94.23,23.88 96.01,23.88 96.71,23.18 S59.5
N$176
  Top 0.305: J59.8 88.15,21.34 89.92,21.34 91.19,22.61 94.78,22.61 S59.4 94.71,22.58
N$177
  Top 0.305: J59.4 91.79,25.37 C59.1 91.98,25.18 S59.3
N$178
  Top 0.305: J60.6 93.73,33.27 94.23,33.78 96.01,33.78 96.71,33.09 S60.5
N$179
  Top 0.305: J60.8 88.15,31.24 89.92,31.24 91.19,32.51 94.78,32.51 S60.4 94.71,32.48
N$180
  Top 0.305: J60.4 91.79,35.27 C60.1 91.98,35.08 S60.3
N$181
  Top 0.305: J61.6 93.73,42.93 94.23,43.43 96.01,43.43 96.71,42.74 S61.5
N$182
  Top 0.305: J61.8 88.15,40.89 89.92,40.89 91.19,42.16 94.78,42.16 S61.4 94.71,42.13
N$183
  Top 0.305: J61.4 91.79,44.93 C61.1 91.98,44.73 S61.3
N$184
  Top 0.305: J62.6 93.73,52.83 94.23,53.34 96.01,53.34 96.71,52.64 S62.5
N$185
  Top 0.305: J62.8 88.15,50.8 89.92,50.8 91.19,52.07 94.78,52.07 S62.4 94.71,52.04
N$186
  Top 0.305: J62.4 91.79,54.83 C62.1 91.98,54.64 S62.3
N$187
  Top 0.305: J63.6 93.73,62.48 94.23,62.99 96.01,62.99 96.71,62.3 S63.5
N$188
  Top 0.305: J63.8 88.15,60.45 89.92,60.45 91.19,61.72 94.78,61.72 S63.4 94.71,61.69
N$189
  Top 0.305: J63.4 91.79,64.48 C63.1 91.98,64.29 S63.3
N$190
  Top 0.305: J64.6 93.73,72.39 94.23,72.9 96.01,72.9 96.71,72.2 S64.5
N$191
  Top 0.305: J64.8 88.15,70.36 89.92,70.36 91.19,71.63 94.78,71.63 S64.4 94.71,71.6
N$192
  Top 0.305: J64.4 91.79,74.39 C64.1 91.98,74.2 S64.3